# Altium PCB PCB1.PcbDoc
Units mm, origin at the board's own origin, x right, y up, seen from the top; angles counter-clockwise.
Board outline 152.4 x 101.6 mm, 2 copper layers (Top Layer, Bottom Layer); 56 components, 47 nets, 171 pads, 0 vias.
Unrouted connection lines stored in the file: 115.
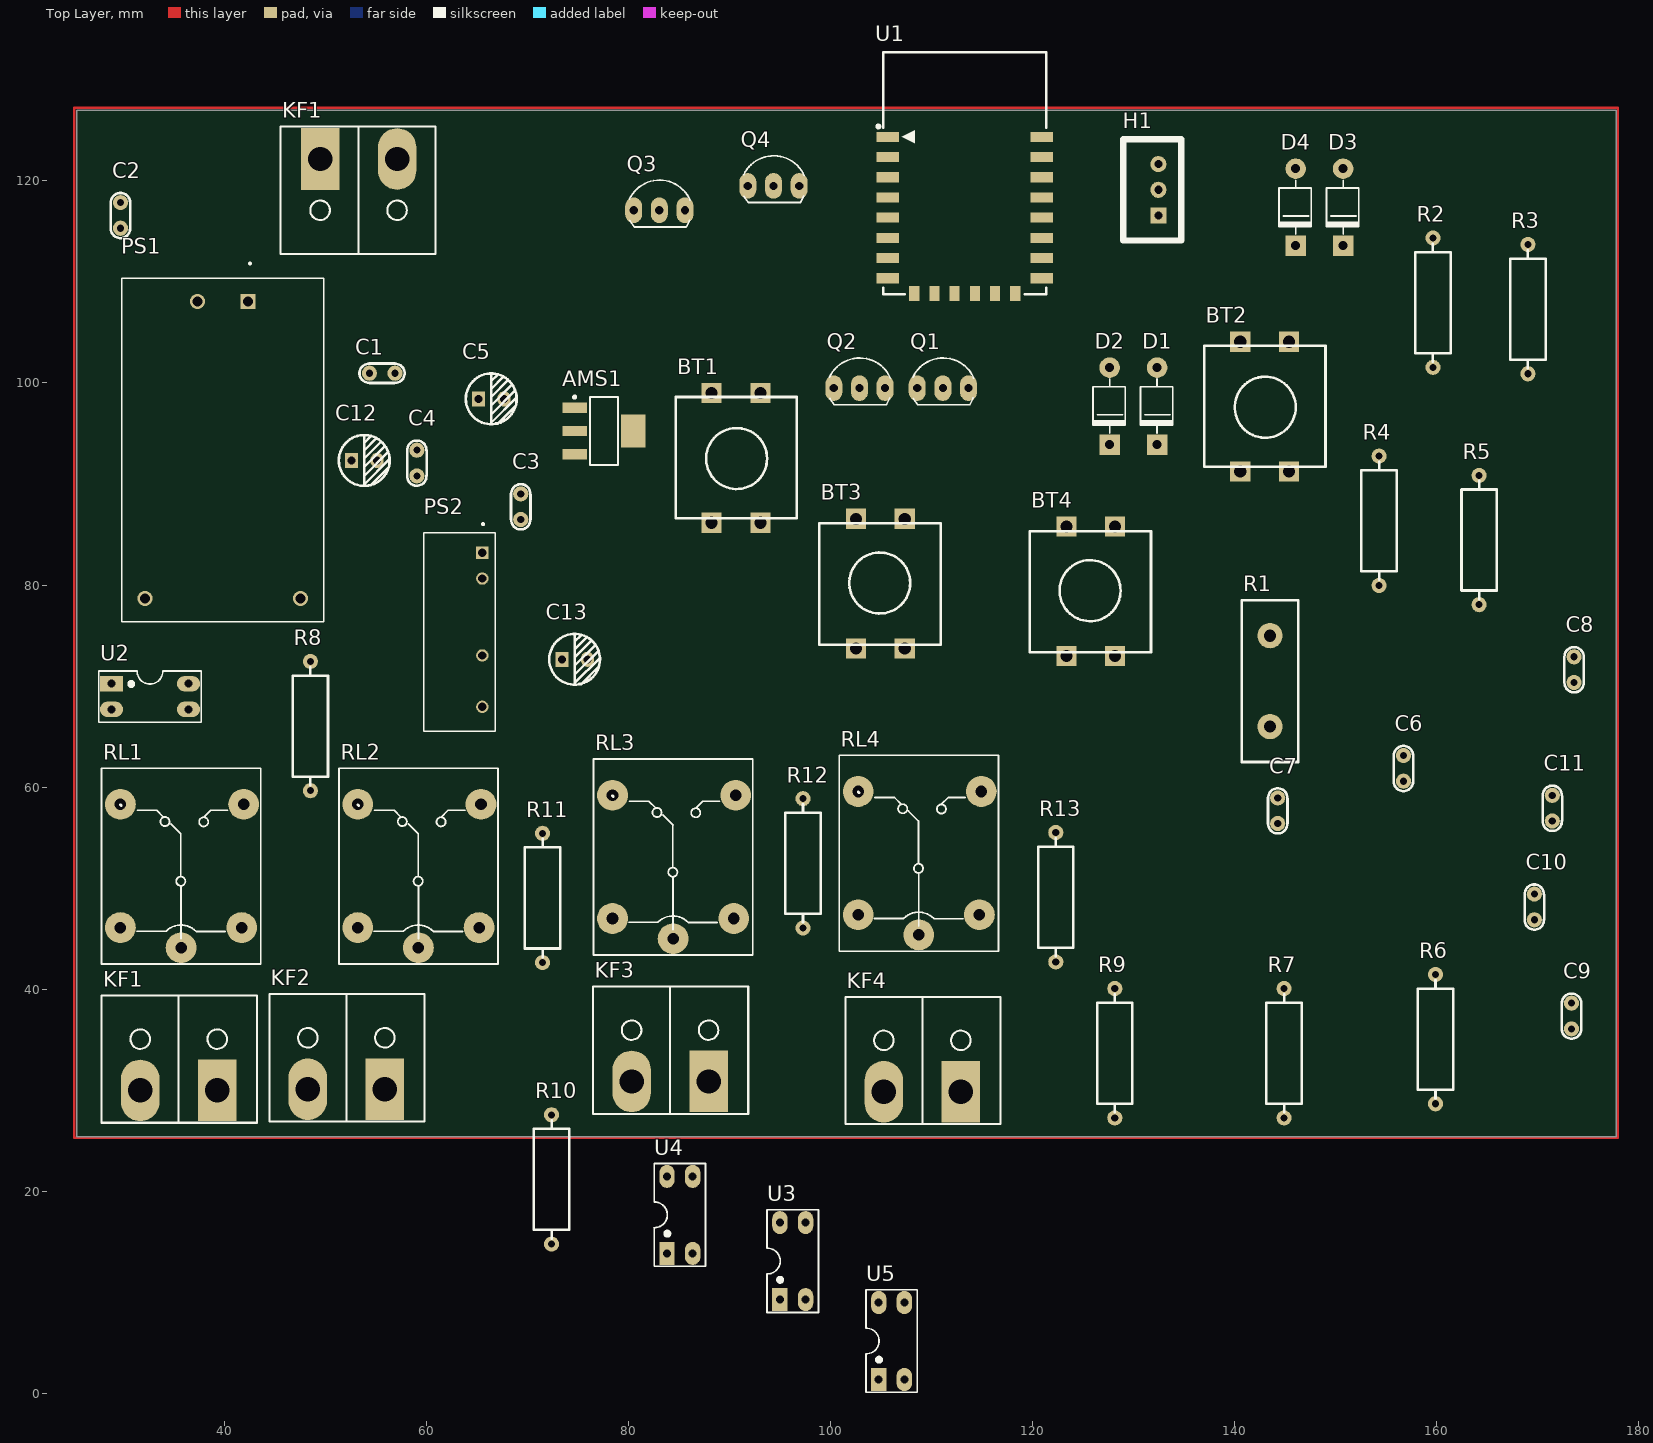
[diagram p0: Top Layer view]
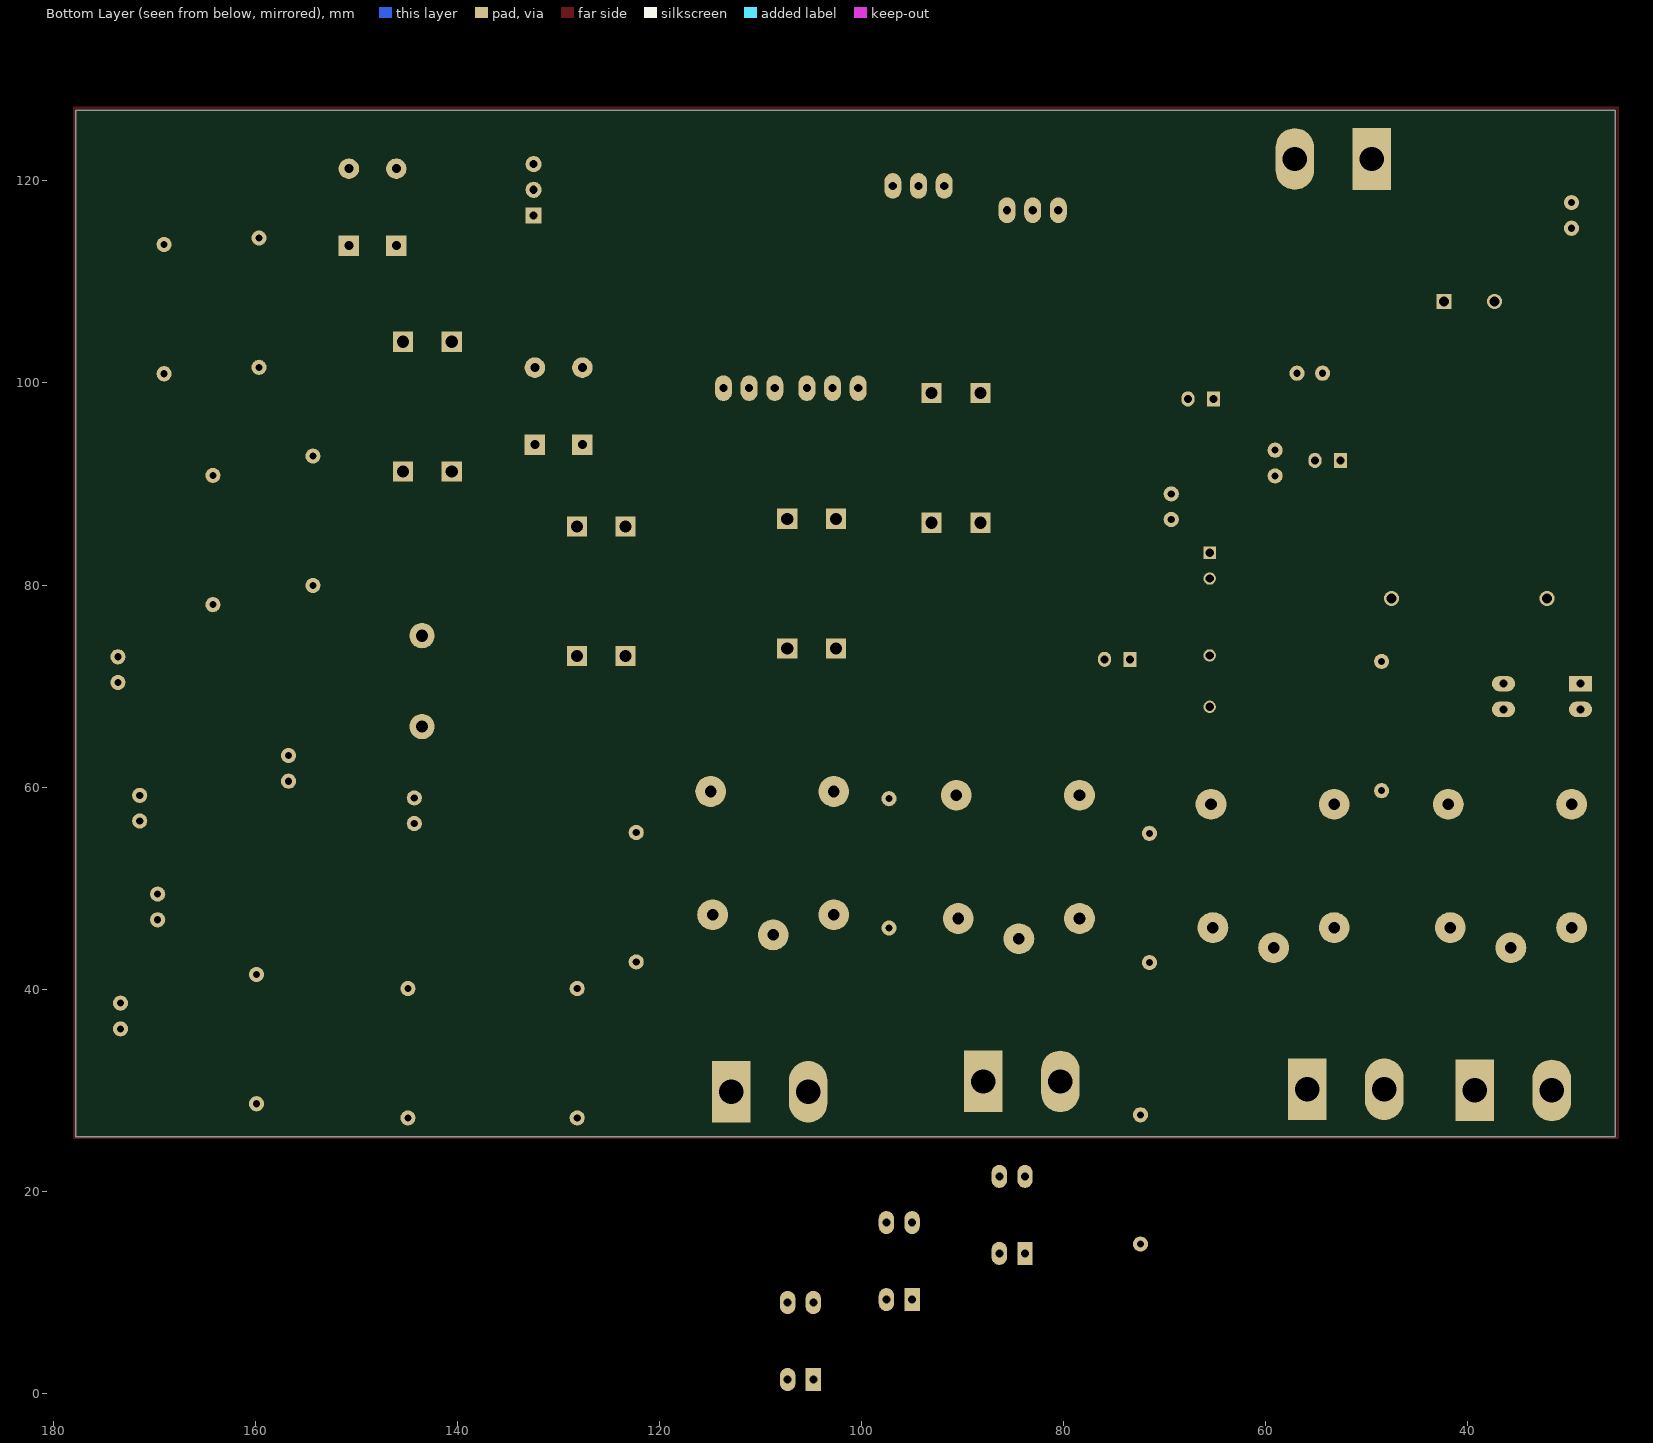
[diagram p1: Bottom Layer view, seen from below]

## Layer stack, top to bottom
Top Solder: solder mask 0.0102, Solder Resist, Dk 3.5
Top Layer: signal copper 0.0356
Dielectric 1: dielectric 0.32, FR-4, Dk 4.8
Bottom Layer: signal copper 0.0356
Bottom Solder: solder mask 0.0102, Solder Resist, Dk 3.5

## Board outline
25.4,25.4 177.8,25.4 177.8,127 25.4,127

## Design rules (kind name [scope] priority, off if disabled: settings)
Clearance [All] p1: gap=0.254 ignorepadtopadclearanceinfootprint=FALSE except(0: Arc-Hole Track-Hole SMDPad-Hole THPad-Hole Via-Hole Fill-Hole Poly-Hole Region-Hole Text-Hole)
PolygonConnect [All] p1: connectstyle=Relief reliefconductorwidth=0.254 reliefentries=4 polygonreliefangle="90 Angle" airgapwidth=0.254
RoutingVias [All] p1: holewidth=0.711 width=1.27 viastyle="Through Hole" minholewidth=0.711 minwidth=1.27 maxholewidth=0.711 maxwidth=1.27
SolderMaskExpansion [All] p1: expansion=0.102 istentingtop=FALSE
Width [All] p1: maxlimit=0.254 minlimit=0.254 preferedwidth=0.254
30 further rules are at their usual default settings.

## Classes and differential pairs
component class Switch: D1 D2 D3 D4 KF1 KF2 KF3 KF4 Q1 Q2 Q3 Q4 R6 R7 R8 R9 R10 R11 R12 R13 RL1 RL2 RL3 RL4 U2 U3 U4 U5
component class Power: AMS1 C1 C2 C3 C4 C5 C12 C13 F? KF1 PS1 PS2
component class MCU: BT1 BT2 BT3 BT4 C6 C7 C8 C9 C10 C11 H1 R1 R2 R3 R4 R5 U1

## Components (designator, comment, footprint, x,y, rotation, side; value= is the part's Value field where it differs from the comment)
AMS1 "AMS1117-3.3V" SOT223 77.576,95.25 r270 top value="AMS1117-3.3V SOT223"
BT1 "Nut Nhan 4 chan 12x12" "12X12 BUTTOM red" 90.678,92.583 r270 top
BT2 "Nut Nhan 4 chan 12x12" "12X12 BUTTOM red" 143.002,97.663 r270 top
BT3 "Nut Nhan 4 chan 12x12" "12X12 BUTTOM red" 104.902,80.137 r90 top
BT4 "Nut Nhan 4 chan 12x12" "12X12 BUTTOM red" 125.73,79.375 r90 top
C1 "100nF" "tu gom" 55.626,100.965 r0 top
C2 "100nF" "tu gom" 29.718,116.586 r90 top
C3 "100nF" "tu gom" 69.342,87.757 r90 top
C4 "100nF" "tu gom" 59.055,92.075 r90 top
C5 "10uF" "tu hoa 5mm" 66.421,98.425 r0 top
C6 "1uF" "tu gom" 156.718,61.849 r90 top
C7 "100nF" "tu gom" 144.272,57.658 r90 top
C8 "100nF" "tu gom" 173.609,71.628 r90 top
C9 "100nF" "tu gom" 173.355,37.338 r90 top
C10 "100nF" "tu gom" 169.672,48.133 r90 top
C11 "100nF" "tu gom" 171.45,57.912 r90 top
C12 "22uF" "tu hoa 5mm" 53.848,92.329 r0 top
C13 "10uF" "tu hoa 5mm" 74.676,72.644 r0 top
D1 "100v" "DIODE 1A" 132.334,102.793 r90 top
D2 "100v" "DIODE 1A" 127.635,102.793 r90 top
D3 "100v" "DIODE 1A" 150.749,122.478 r90 top
D4 "100v" "DIODE 1A" 146.05,122.478 r90 top
H1 "Header 3P 2.54 Duc Thang" XH2.54M-3 132.461,116.586 r90 top
KF1 "CON 2 KF7.62" "CON 2 KF7.62" 49.53,122.174 r0 top
KF1 "CON 2 KF7.62" "CON 2 KF7.62" 39.243,29.972 r180 top
KF2 "CON 2 KF7.62" "CON 2 KF7.62" 55.829,30.099 r180 top
KF3 "CON 2 KF7.62" "CON 2 KF7.62" 87.884,30.861 r180 top
KF4 "CON 2 KF7.62" "CON 2 KF7.62" 112.852,29.845 r180 top
PS1 "HLK-PM01" CONV_HLK-PM01 39.838,93.377 r270 top
PS2 "RKZ-0505S" CONV_RKZ-0505S 63.277,75.36 r270 top
Q1 "?" TO92 111.125,99.491 r0 top value=C9014
Q2 "?" TO92 102.87,99.491 r0 top value=C9014
Q3 "?" TO92 83.058,117.094 r0 top value=C9014
Q4 "?" TO92 94.361,119.507 r0 top value=C9014
R1 "47D-15" "tro nhiet d15" 143.51,70.485 r90 top
R2 "10k" "tro vach 1/2w" 159.639,107.95 r90 top
R3 "10k" "tro vach 1/2w" 169.037,107.315 r90 top
R4 "10k" "tro vach 1/2w" 154.305,86.36 r90 top
R5 "10k" "tro vach 1/2w" 164.211,84.455 r90 top
R6 "1k" "tro vach 1/2w" 159.893,35.052 r90 top
R7 "1k" "tro vach 1/2w" 144.907,33.655 r90 top
R8 "510R" "tro vach 1/2w" 48.514,66.04 r270 top
R9 "510R" "tro vach 1/2w" 128.143,33.655 r90 top
R10 "1k" "tro vach 1/2w" 72.39,21.159 r90 top
R11 "1k" "tro vach 1/2w" 71.501,49.022 r90 top
R12 "510R" "tro vach 1/2w" 97.282,52.451 r90 top
R13 "510R" "tro vach 1/2w" 122.301,49.099 r90 top
RL1 "Relay" "Relay 5 Chan SRD" 35.718,44.093 r90 top
RL2 "Relay" "Relay 5 Chan SRD" 59.213,44.093 r90 top
RL3 "Relay" "Relay 5 Chan SRD" 84.424,44.99 r90 top
RL4 "Relay" "Relay 5 Chan SRD" 108.743,45.363 r90 top
U1 "ESP8266 12" "ESP8266 12" 105.289,124.364 r0 top
U2 "OPTO PC817 DIP4" DIP4 28.765,70.231 r270 top value=PC817
U3 "OPTO PC817 DIP4" DIP4 94.996,9.207 r0 top value=PC817
U4 "OPTO PC817 DIP4" DIP4 83.82,13.779 r0 top value=PC817
U5 "OPTO PC817 DIP4" DIP4 104.775,1.295 r0 top value=PC817

## Footprints (in the part's own frame and the unit in brackets; to place one, negate y for a bottom-side part, rotate by r counter-clockwise, add the part's x,y. Pads: shape width x height; smd on the part's side, far side on the other; paste and mask are expansions set on the pad)
"12X12 BUTTOM red" [mm]
  rect 2x2 hole 1.2: 1(-6.414,2.38) 2(-6.413,-2.446) 3(6.413,2.38) 4(6.414,-2.446)
  silkscreen extent -6.03,-6 5.97,6, body extent -6.71,-6.01 6.71,6.01, height 8.84
"CON 2 KF7.62" [mil]
  rect 150x240 hole 95: 1(-2,0)
  oval 150x240 hole 95: 2(298,0)
  silkscreen extent -157,-370 448,126, body extent -152,-370 448,122, height 493
CONV_HLK-PM01 [mm]
  rect 1.508x1.508 / inner round 1.508 / far side rect 1.508x1.508 hole 1: 1(-14.7,2.5)
  round 1.508 hole 1: 2(-14.7,-2.5) 3(14.7,7.7) 4(14.7,-7.7)
  silkscreen extent -18.55,-10 17,10, body extent -17,-10.1 17,10.1, height 15
CONV_RKZ-0505S [mm]
  rect 1.23x1.23 hole 0.82: 1(-7.825,2.255)
  round 1.23 hole 0.82: 2(-5.285,2.255) 5(2.335,2.255) 7(7.415,2.255)
  silkscreen extent -10.76,-3.52 9.82,3.52
"DIODE 1A" [mil] "Diode 1A"
  round 80 hole 35: 1(-50,0)
  rect 80x80 hole 35: 2(-350,0)
  silkscreen extent -305,-61 -95,65, body extent -366,-61 -34,65, height 122
DIP4 [mil] "W.300/L.400"
  rect 60x90 hole 31: 1(0,2.52)
  oval 60x90 hole 31: 2(100,2.52) 3(100,302.52) 4(0,302.52)
  silkscreen extent -50,-47 150,353, body extent -59,-7 159,307, height 170
"ESP8266 12" [mm] "ESP-12 Wi-Fi Module by AI-Thinker"
  rect 2.25x1 smd: 1(0.375,0) 2(0.375,-2) 3(0.375,-4) 4(0.375,-6) 5(0.375,-8) 6(0.375,-10) 7(0.375,-12) 8(0.375,-14) 15(15.625,-14) 16(15.625,-12) 17(15.625,-10) 18(15.625,-8) 19(15.625,-6) 20(15.625,-4) 21(15.625,-2) 22(15.625,0)
  rect 1x1.5 smd: 9(3,-15.5) 10(5,-15.5) 11(7,-15.5) 12(9,-15.5) 13(11,-15.5) 14(13,-15.5)
  silkscreen extent -0.7,-15.57 16.08,8.37, body extent 0,-15.49 16,8.51, height 2.75
"Relay 5 Chan SRD" [mil] "Relay SPDT, 5 pin, 10A,W 650mil, L 800mil, H 800mil"
  round 120 hole 45: 1(0,0) 2(559.06,236.22) 3(559.06,-243.78) 4(78.74,-236.22) 5(78.74,236.22)
  silkscreen extent -63,-311 700,310, body extent -55,-306 697,304, height 602
SOT223 [mm]
  rect 1x2.4 smd: 1(-2.3,-2.9) 2(0,-2.9) 3(2.3,-2.9)
  rect 3.3x2.4 smd: 4(0,2.9)
  silkscreen extent -3.47,-3.02 3.35,1.4, body extent -3.25,-3.56 3.25,3.4, height 1.68
TO92 [mil] "TO-92"
  oval 66x100 hole 32: 1(-100,0) 2(0,0) 3(100,0)
  silkscreen extent -117,-65 120,118, body extent -109,-66 109,95, height 245
"tro nhiet d15" [mm]
  round 2.5 hole 1.2: 1(-4.5,0) 2(4.5,0)
  silkscreen extent -8,-2.79 8,2.79, body extent -8,-2.8 8,2.8, height 22.83
"tro vach 1/2w" [mm]
  round 1.5 hole 0.7: 1(-6.4,0) 2(6.4,0)
  silkscreen extent -5.84,-1.75 5.84,1.75, body extent -6.62,-1.75 6.62,1.75, height 3.5
"tu gom" [mm] "Tu gom mini"
  round 1.5 hole 0.7: 1(-1.27,0) 2(1.27,0)
  silkscreen extent -2.25,-0.97 2.22,0.97, body extent -2.92,-0.85 2.92,0.85, height 6.12
"tu hoa 5mm" [mm]
  rect 1.3x1.5 hole 0.8: 1(-1.27,0)
  oval 1.3x1.5 hole 0.8: 2(1.27,0)
  silkscreen extent -2.51,-2.51 2.51,2.51, body extent -3.12,-3.18 3.23,3.18, height 14.55
XH2.54M-3 [mm]
  rect 1.6x1.6 hole 0.8: 1(0,0)
  round 1.6 hole 0.8: 2(2.54,0) 3(5.08,0)
  silkscreen extent -2.48,-2.26 7.56,3.46, body extent -2.48,-2.26 7.56,3.48, height 6.91

## Part data
AMS1: library part "AMS1117 SMD", "Dán", Chung_Loai=Dán, Don_Vi=Con, Ma_Hang=MH000596
C1 C2 C3 C4 C6 C7 C8 C9 C10 C11: library part "Tu gom 15pF 50V", "Cắm", Chung_Loai=Cắm, Don_Vi=Con, Ma_Hang=MH004767, So_Chan=2, Ten_Linh_Kien="Tụ gốm 15P 50V"
C5 C12 C13: library part "Tu Hoa 0.1uF 50V 5x11", "Cắm", Chung_Loai=Cắm, Don_Vi=Con, Ma_Hang=MH006853, So_Chan=2, Ten_Linh_Kien="Tụ Hóa 0.1uF 50V"
D1 D2 D3 D4: library part "Diode 1N4007", "Cắm", Chung_Loai=Cắm, Don_Vi=Con, Ma_Hang=MH001063, Ten_Linh_Kien="Diode 1N4007 1A (DIP)"
H1 KF1 KF1 KF2 KF3 KF4: "Cắm", Chung_Loai=Cắm, Don_Vi=Con
  H1: Ma_Hang=MH001292, Ten_Linh_Kien="Header 3P XH2.54-3P Đực Thẳng"
  KF1 KF1 KF2 KF3 KF4: Ma_Hang=MH002053, Ten_Linh_Kien="CON 2 KF7.62-2P 7.62MM (Đen Thẳng)"
PS1: "The HLK-PM01 is a small size low cost AC to DC converter which can take in 110V/220V AC at 50/60 Hz and give 5V 3W output. The module is can be used in designs which run on 5V and needs to be powered form the AC mains.", Package=None, Check_prices=https://www.snapeda.com/parts/hlk-pm01/Hi-link/view-part/?ref=eda, MF=Hi-link, MP=hlk-pm01, SnapEDA_Link=https://www.snapeda.com/parts/hlk-pm01/Hi-link/view-part/?ref=snap
PS2: "RKZ Series 2 W Single Output 5 V DC/DC Converter - SIP-7", Package=None, Availability=Unavailable, MP=RKZ-0505S, Price=None
Q1 Q2 Q3 Q4: library part "Trans 2N3904", "NPN transistor EBC"
R1: library part "Tro Nhiet NTC 47D-15", "Cắm", Chung_Loai=Cắm, Don_Vi=Con, Ma_Hang=MH005858, So_Chan=2, Ten_Linh_Kien="Điện Trở Nhiệt NTC 47D-15"
R2 R3 R4 R5: library part "Tro Vach 1/2W 5% 47K", "Cắm", Chung_Loai=Cắm, Don_Vi=Con, Ma_Hang=MH008002, So_Chan=2, Ten_Linh_Kien="Trở 5% 1/2w 47k"
R6 R7 R8 R9 R10 R11 R12 R13: library part "Tro Vach 1/2W 5% 1M", "Cắm", Chung_Loai=Cắm, Don_Vi=Con, Ma_Hang=MH007242, So_Chan=2, Ten_Linh_Kien="Trở 5% 1/2w 1M"
RL1 RL2 RL3 RL4: library part "Relay 5 Chan SRD", "Relay 5 Chan", Ma_Hang=MH009374, Ten="Relay 5V10A SRD-05VDC-SL-C Chính Hãng"
U1: "ESP8266 12 22 Pin", IC=ESP8266-EX, Vendor=Ai-thinker
U2 U3 U4 U5: "Single Opto"

## Nets (pads, with @x,y where several pads share a name; then routed paths per layer and width w, separated by ;. In a path a pad name is that pad's centre, name@x,y a point inside that pad or via, vN(x,y) a via of type N, cw(c..) or ccw(c..) an arc to the next point about the centre after c; other vN are vias at no path point)
3.3V: AMS1.2 AMS1.4 C3.1 C12.1 R2.2 R3.2 R4.2 R5.2
5V: AMS1.3 C1.2 C4.1 C5.1 PS2.1
5V_RL: C13.1 D1.2 D2.2 D3.2 D4.2 PS2.7 RL1.5 RL2.5 RL3.5 RL4.5 U2.4 U3.4 U4.4 U5.4
ADC: R1.2 U1.2
Boot: BT3.1 BT3.2 C10.1 R4.1 U1.16
Buttom: U1.18
EN: BT1.1 BT1.2 C8.1 R2.1 U1.3
GND: AMS1.1 BT1.3 BT1.4 BT2.3 BT2.4 BT3.3 BT3.4 BT4.3 BT4.4 C3.2 C4.2 C5.2 C6.2 C7.2 C8.2 C9.2 C10.2 C11.2 C12.2 H1.1 PS1.3 PS2.2 R1.1 U1.15
GND_RL: C13.2 PS2.5 Q1.1 Q2.1 Q3.1 Q4.1
GPIO: U2.2 U3.2 U4.2 U5.2
Led: U1.17
NetC1_1: C1.1 PS1.4
NetC2_1: C2.1 KF1.2@57.099,122.174
NetC2_2: C2.2 PS1.2
NetD1_1: D1.1 Q1.3 RL1.4
NetD2_1: D2.1 Q2.3 RL2.4
NetD3_1: D3.1 Q3.3 RL3.4
NetD4_1: D4.1 Q4.3 RL4.4
NetKF1_1: KF1.1@39.294,29.972 RL1.3
NetKF1_2: KF1.2@31.674,29.972 RL1.1 RL1.2
NetKF2_1: KF2.1 RL2.3
NetKF2_2: KF2.2 RL2.1 RL2.2
NetKF3_1: KF3.1 RL3.3
NetKF3_2: KF3.2 RL3.1 RL3.2
NetKF4_1: KF4.1 RL4.3
NetKF4_2: KF4.2 RL4.1 RL4.2
NetQ1_2: Q1.2 R8.2
NetQ2_2: Q2.2 R9.2
NetQ3_2: Q3.2 R12.2
NetQ4_2: Q4.2 R13.2
NetR6_1: R6.1 U2.1
NetR7_1: R7.1 U3.1
NetR8_1: R8.1 U2.3
NetR9_1: R9.1 U3.3
NetR10_1: R10.1 U4.1
NetR11_1: R11.1 U5.1
NetR12_1: R12.1 U4.3
NetR13_1: R13.1 U5.3
Relay1: U1.6
Relay2: U1.7
Relay3: U1.5
Relay4: U1.19
RST: BT2.1 BT2.2 C9.1 R3.1 U1.1
RXD0: H1.3 U1.21
Switch: BT4.1 BT4.2 C11.1 R5.1 U1.20
TXD0: H1.2 U1.22
VCC: C6.1 C7.1 R6.2 R7.2 R10.2 R11.2 U1.8
pads on no net: KF1.1@49.479,122.174 PS1.1 U1.4 U1.9 U1.10 U1.11 U1.12 U1.13 U1.14
copper on no net: | length 509.5
  Top Layer w0.254: 25.146,25.273 177.927,25.273 177.927,127.254 25.146,127.254 25.146,25.273

## Text inside footprints (layer, text, board x,y; h text height)
U1: Mechanical 13 "CUTOUT POLYGON" at 105.416,131.73 h0.25; Mechanical 13 "ANTENNA AREA" at 105.416,132.238 h0.25